# Allegro board bicycle.brd
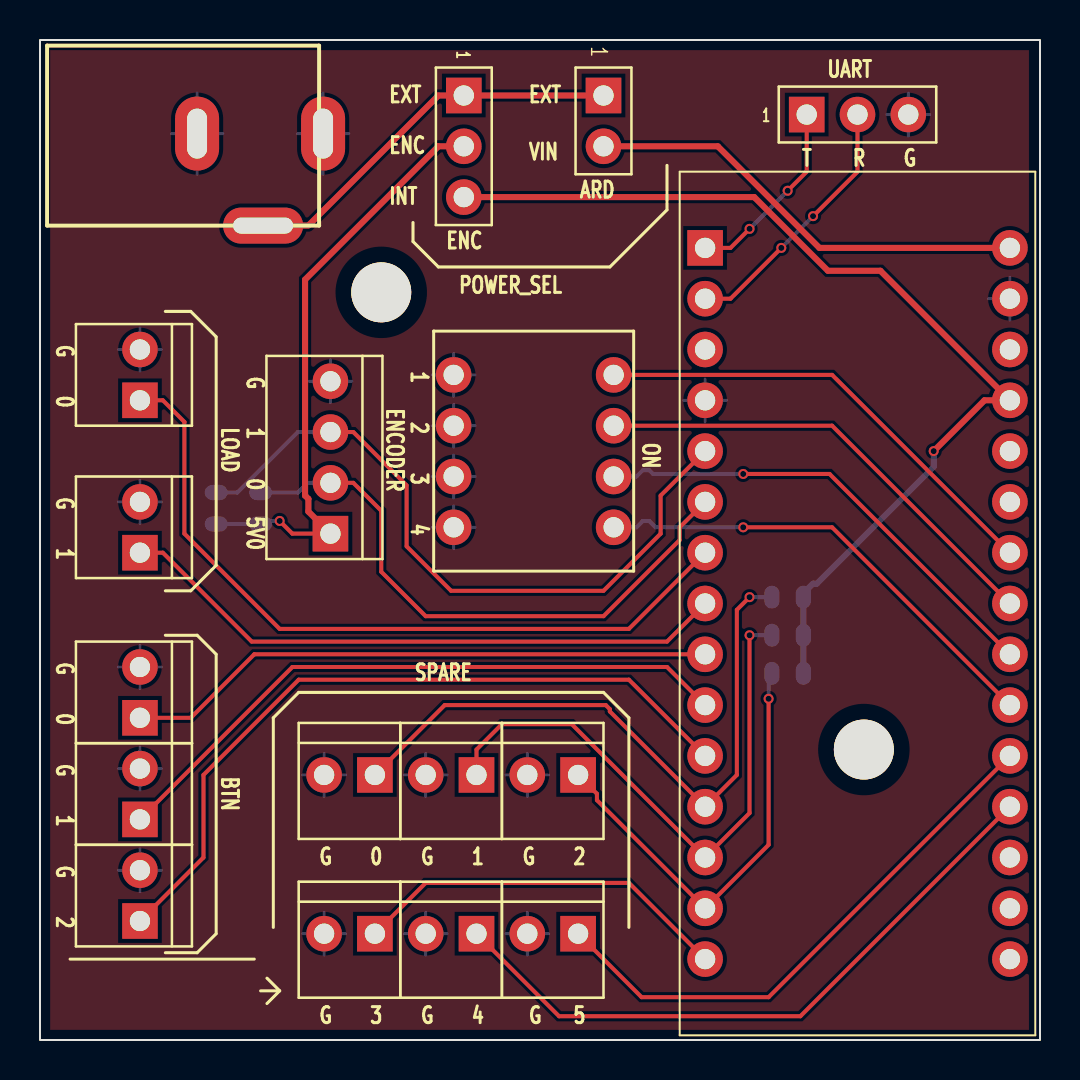
[diagram p0: board, top side]
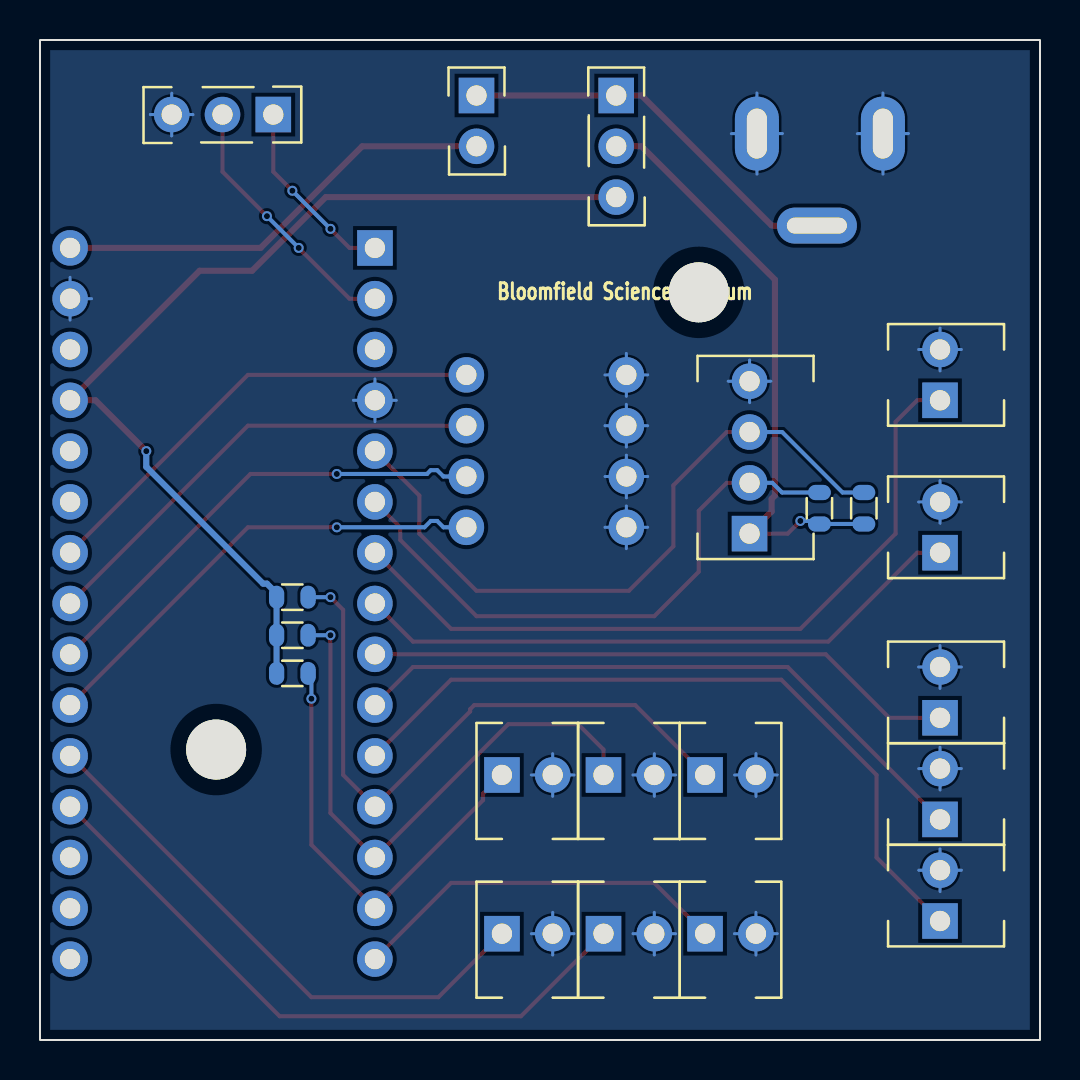
[diagram p1: board, bottom side, seen from below]

Outline 50 x 50 mm; copper layers: TOP, BOTTOM. Coordinates in mm from the lower left corner of the outline.
Outline path: rectangle 0,0 50,50

## Placement (name value [footprint] x y rotation side)
J5  Molex 2x1 TH  [MOLEX2X1_100_TH]  5 33.26 90 top
J6  Molex 2x1 TH  [MOLEX2X1_100_TH]  5 25.64 90 top
J7  Molex 2x1 TH  [MOLEX2X1_100_TH]  5 17.38 90 top
J8  Molex 2x1 TH  [MOLEX2X1_100_TH]  5 12.3 90 top
J9  Molex 2x1 TH  [MOLEX2X1_100_TH]  5 7.22 90 top
J10  Molex 2x1 TH  [MOLEX2X1_100_TH]  15.48 13.25 180 top
J11  Molex 2x1 TH  [MOLEX2X1_100_TH]  20.56 13.25 180 top
J12  Molex 2x1 TH  [MOLEX2X1_100_TH]  25.64 13.25 180 top
J13  Molex 2x1 TH  [MOLEX2X1_100_TH]  15.48 5.32 180 top
J14  Molex 2x1 TH  [MOLEX2X1_100_TH]  20.56 5.32 180 top
J15  Molex 2x1 TH  [MOLEX2X1_100_TH]  25.64 5.32 180 top
J17  Molex 4x1 TH  [MOLEX4X1_100_TH]  14.52 29.13 90 top
J18  HEADER 3x1 TH  [HEADER3X1_100_TH]  38.34 46.27 0 top
J19  HEADER 3x1 TH  [HEADER3X1_100_TH]  21.19 47.23 270 top
J20  HEADER 2x1 TH  [HEADER2X1_100_TH]  28.18 47.23 270 top
J21  DC-Jack-12V-1A  [POWER_CONNECTOR]  7.86 45.32 0 top
M1  -  [ARDUINO_NANO]  40.88 21.83 0 top
NOREF  -  [unnamed]  41.19 14.52 0 top
NOREF#2  -  [unnamed]  17.06 37.38 0 top
R1  7.32K  [0603]  11.03 26.59 90 bottom
R2  7.32K  [0603]  8.81 26.59 90 bottom
R3  7.32K  [0603]  37.38 22.14 0 bottom
R4  7.32K  [0603]  37.38 20.24 0 bottom
R5  7.32K  [0603]  37.38 18.33 0 bottom
SW1  SW DIP 4  [DIP_SW_4]  24.68 29.45 270 top

## Library data of the parts
J5-J15 J20 = HEADER 2X1 TH
J17 = HEADER 4X1 TH
J18 J19 = HEADER 3x1 TH
J21 = DC-JACK
M1 = arduino_nano
R1-R5 = RESISTOR
SW1 = SW DIP 4

## Footprints (pads in the part's own frame, mm; a bottom-side part is the same pattern mirrored in y, then rotated)
0603
  oval 0.762x1.143 smd: 1(-0.787,0) 2(0.787,0)
ARDUINO_NANO
  rect 1.778x1.778 hole 1.016: 1(-7.62,17.78)
  round 1.778 hole 1.016: 2(-7.62,15.24) 3(-7.62,12.7) 4(-7.62,10.16) 5(-7.62,7.62) 6(-7.62,5.08) 7(-7.62,2.54) 8(-7.62,0) 9(-7.62,-2.54) 10(-7.62,-5.08) 11(-7.62,-7.62) 12(-7.62,-10.16) 13(-7.62,-12.7) 14(-7.62,-15.24) 15(-7.62,-17.78) 16(7.62,-17.78) 17(7.62,-15.24) 18(7.62,-12.7) 19(7.62,-10.16) 20(7.62,-7.62) 21(7.62,-5.08) 22(7.62,-2.54) 23(7.62,0) 24(7.62,2.54) 25(7.62,5.08) 26(7.62,7.62) 27(7.62,10.16) 28(7.62,12.7) 29(7.62,15.24) 30(7.62,17.78)
DIP_SW_4
  round 1.778 hole 1.016: 1(-3.81,-4) 2(-1.27,-4) 3(1.27,-4) 4(3.81,-4) 5(3.81,4) 6(1.27,4) 7(-1.27,4) 8(-3.81,4)
HEADER2X1_100_TH
  rect 1.778x1.778 hole 1.016: 1(0,0)
  round 1.778 hole 1.016: 2(2.54,0)
HEADER3X1_100_TH
  rect 1.778x1.778 hole 1.016: 1(0,0)
  round 1.778 hole 1.016: 2(2.54,0) 3(5.08,0)
MOLEX2X1_100_TH
  rect 1.778x1.778 hole 1.016: 1(-1.27,0)
  round 1.778 hole 1.016: 2(1.27,0)
MOLEX4X1_100_TH
  rect 1.778x1.778 hole 1.016: 1(-3.81,0)
  round 1.778 hole 1.016: 2(-1.27,0) 3(1.27,0) 4(3.81,0)
POWER_CONNECTOR
  oval 4x1.8 hole 3x0.8: 1(3.3,-4.6)
  oval 2.2x3.7 hole 1x2.5: 2(0,0) 3(6.3,0)
unnamed
  round 2.997 hole 2.997 unplated: (0,0)

## Nets
3V3: M1.17(3V3)
5V0: J19.3 M1.27(5V) R3.2 R4.2 R5.2
GND: J5.2 J6.2 J7.2 J8.2 J9.2 J10.2 J11.2 J12.2 J13.2 J14.2 J15.2 J17.4 J18.3 J21.2(SHIELD) J21.3 M1.4(GND#4) M1.29(GND#29) SW1.1(A1) SW1.2(A2) SW1.3(A3) SW1.4(A4)
ARD_VIN: J20.2 M1.30(VIN)
BTN0: J7.1 M1.9(6)
BTN1: J8.1 M1.10(7)
BTN2: J9.1 M1.11(8)
ENC0: J17.2 M1.6(3) R1.2
ENC1: J17.3 M1.5(2) R2.2
ENC_5V0: J17.1 J19.2 R1.1 R2.1
EXT_5V0: J19.1 J20.1 J21.1(CENTER)
ID0: M1.24(19/ADC5) SW1.8(B1)
ID1: M1.23(18/ADC4) SW1.7(B2)
ID2: M1.22(17/ADC3) SW1.6(B3)
ID3: M1.21(16/ADC2) SW1.5(B4)
LOAD0: J5.1 M1.7(4)
LOAD1: J6.1 M1.8(5)
RX: J18.2 M1.2(0/RXD)
SPR0: J10.1 M1.12(9) R3.1
SPR1: J11.1 M1.13(10/SS) R4.1
SPR2: J12.1 M1.14(11/MOSI) R5.1
SPR3: J13.1 M1.15(12/MISO)
SPR4: J14.1 M1.19(14/ADC0)
SPR5: J15.1 M1.20(15/ADC1)
TX: J18.1 M1.1(1/TXD)

Pads without a net: M1 3 16 18 25 26 28

## Via types
v1: diameter 0.5, hole 0.305, TOP to BOTTOM, 11 vias

## Routing (per net, layer and track width the routed paths; a pad name or vN(x,y) marks a point on that pad's centre or on a via; arc(x,y) is an arc through that point)
5V0: length 50.3
  TOP w0.305: 21.19,42.15 35.71,42.15 39.39,38.46 42.02,38.46 M1.27 47.23,31.99 v1(44.69,29.45)
  BOTTOM w0.305: R5.2 R4.2 R3.2 38.17,22.33 38.65,22.82 38.85,22.82 44.69,28.66 v1(44.69,29.45)
GND: length 93.2
  BOTTOM w0.152: 19.62,33.26 SW1.1 ; SW1.1 21.75,33.26 ; SW1.1 20.68,34.32 ; SW1.1 20.68,32.19 ; 48.5,37.07 48.5,38.13 ; 48.5,37.07 47.43,37.07 ; 48.5,37.07 48.5,36 ; J18.3 43.42,47.34 ; J18.3 43.42,45.21 ; J18.3 42.35,46.27 ; J18.3 44.48,46.27 ; 19.29,12.19 J11.2 ; J11.2 19.29,14.32 ; J11.2 18.22,13.25 ; J11.2 20.35,13.25 ; J7.2 6.06,18.65 ; J7.2 3.93,18.65 ; J7.2 5,17.58 ; J7.2 5,19.72 ; 3.93,13.57 J8.2 ; J8.2 6.06,13.57 ; J8.2 5,14.64 ; J8.2 5,12.5 ; 13.14,5.32 J13.2 ; J13.2 14.21,4.25 ; J13.2 15.27,5.32 ; J13.2 14.21,6.38 ; 13.46,32.94 J17.4 ; J17.4 14.52,31.87 ; J17.4 14.52,34 ; J17.4 15.59,32.94 ; 33.26,31.99 33.26,33.05 ; 33.26,31.99 32.19,31.99 ; 33.26,31.99 33.26,30.92 ; 33.26,31.99 34.32,31.99 ; J15.2 24.37,6.38 ; J15.2 23.3,5.32 ; J15.2 25.43,5.32 ; J15.2 24.37,4.25 ; 18.22,5.32 J14.2 ; J14.2 19.29,4.25 ; J14.2 19.29,6.38 ; J14.2 20.35,5.32 ; 20.68,24.57 SW1.4 ; SW1.4 20.68,26.7 ; SW1.4 19.62,25.64 ; SW1.4 21.75,25.64 ; J6.2 6.06,26.91 ; J6.2 5,27.97 ; J6.2 3.93,26.91 ; J6.2 5,25.84 ; 6.58,45.32 J21.2 ; J21.2 7.86,43.29 ; J21.2 7.86,47.35 ; J21.2 9.13,45.32 ; 5,7.42 J9.2 ; J9.2 3.93,8.49 ; J9.2 6.06,8.49 ; J9.2 5,9.56 ; 13.14,13.25 J10.2 ; J10.2 14.21,12.19 ; J10.2 14.21,14.32 ; J10.2 15.27,13.25 ; SW1.3 20.68,29.24 ; SW1.3 19.62,28.18 ; SW1.3 21.75,28.18 ; SW1.3 20.68,27.11 ; J12.2 25.43,13.25 ; J12.2 24.37,14.32 ; J12.2 24.37,12.19 ; J12.2 23.3,13.25 ; 19.62,30.72 SW1.2 ; SW1.2 21.75,30.72 ; SW1.2 20.68,29.65 ; SW1.2 20.68,31.78 ; 14.15,43.29 J21.3 ; J21.3 15.43,45.32 ; J21.3 14.15,47.35 ; J21.3 12.88,45.32 ; 5,33.46 J5.2 ; J5.2 6.06,34.53 ; J5.2 3.93,34.53 ; J5.2 5,35.59
ARD_VIN: length 22.4
  TOP w0.305: M1.30 38.97,39.61 33.89,44.69 28.18,44.69
BTN0: length 29.6
  TOP w0.203: J7.1 7.54,16.11 10.71,19.29 33.26,19.29
BTN1: length 32.2
  TOP w0.203: 33.26,16.75 31.35,18.65 12.62,18.65 J8.1
BTN2: length 37.3
  TOP w0.203: J9.1 8.17,9.13 8.17,13.25 12.94,18.02 29.45,18.02 33.26,14.21
ENC0: length 29.7
  TOP w0.203: 33.26,26.91 31.99,25.64 31.99,25 28.18,21.19 19.29,21.19 17.06,23.41 17.06,26.46 15.67,27.86 J17.2
  BOTTOM w0.203: J17.2 13.38,27.86 12.9,27.37 R1.2
ENC1: length 34.8
  TOP w0.203: 33.26,29.45 31.03,27.22 31.03,25.32 28.18,22.46 20.56,22.46 18.33,24.68 18.33,27.73 15.67,30.4 J17.3
  BOTTOM w0.203: R2.2 9.87,27.37 12.89,30.4 J17.3
ENC_5V0: length 30
  TOP w0.203: J17.1 12.62,25.32 v1(11.98,25.95)
  TOP w0.305: J17.1 13.42,26.42 13.42,27.06 13.25,27.22 13.25,38.02 19.92,44.69 21.19,44.69
  BOTTOM w0.203: R2.1 R1.1 11.18,25.95 v1(11.98,25.95)
EXT_5V0: length 19.7
  TOP w0.203: 13.46,40.76 13.42,40.72
  TOP w0.305: 13.46,40.76 19.92,47.23 J19.1 J20.1 ; 13.42,40.72 J21.1
ID0: length 23.5
  TOP w0.203: SW1.8 39.61,33.26 48.5,24.37
ID1: length 23.5
  TOP w0.203: SW1.7 39.61,30.72 M1.23
ID2: length 23.8
  TOP w0.203: M1.22 39.48,28.3 v1(35.16,28.3)
  BOTTOM w0.203: SW1.6 29.83,28.18 30.14,28.49 30.46,28.49 30.65,28.3 v1(35.16,28.3)
ID3: length 23.8
  TOP w0.203: 48.5,16.75 39.61,25.64 v1(35.16,25.64)
  BOTTOM w0.203: v1(35.16,25.64) 30.78,25.64 30.46,25.95 30.14,25.95 29.83,25.64 SW1.5
LOAD0: length 37.8
  TOP w0.203: 5,31.99 6.14,31.99 7.22,30.91 7.22,25.32 11.98,20.56 29.45,20.56 33.26,24.37
LOAD1: length 30.9
  TOP w0.203: 33.26,21.83 31.35,19.92 10.59,19.92 6.14,24.37 J6.1
RX: length 13.1
  TOP w0.203: v1(37.07,39.61) 34.53,37.07 33.26,37.07 ; v1(38.65,41.19) 40.88,43.42 J18.2
  BOTTOM w0.203: v1(37.07,39.61) v1(38.65,41.19)
SPR0: length 32.6
  TOP w0.203: v1(35.48,22.14) 34.84,21.51 34.84,13.25 33.26,11.67 28.49,16.43 28.49,16.54 28.29,16.75 20.24,16.75 J10.1
  BOTTOM w0.203: v1(35.48,22.14) R3.1
SPR1: length 29.1
  TOP w0.203: J11.1 21.83,14.52 23.1,15.79 26.59,15.79 33.26,9.13 35.48,11.35 v1(35.48,20.24)
  BOTTOM w0.203: v1(35.48,20.24) R4.1
SPR2: length 22.4
  TOP w0.203: J12.1 27.85,12.31 27.85,11.99 33.26,6.59 36.43,9.76 v1(36.43,17.06)
  BOTTOM w0.203: v1(36.43,17.06) 36.43,18.17 R5.1
SPR3: length 19.1
  TOP w0.203: J13.1 19.29,7.86 29.45,7.86 33.26,4.05
SPR4: length 32.7
  TOP w0.203: J14.1 25.95,1.19 38.02,1.19 M1.19
SPR5: length 27.9
  TOP w0.203: J15.1 30.08,2.14 36.43,2.14 M1.20
TX: length 9.5
  TOP w0.203: 33.26,39.61 34.53,39.61 v1(35.48,40.56) ; J18.1 38.34,43.42 v1(37.38,42.46)
  BOTTOM w0.203: v1(35.48,40.56) v1(37.38,42.46)

## Copper pours and planes (outline as drawn; the poured copper is in the pictures)
GND on BOTTOM: 0.51,0.51 0.51,49.49 49.49,49.49 49.49,0.51
Net_26 on TOP: 0.51,0.51 0.51,49.49 49.45,49.49 49.45,0.51

## Text on the board
Ref Des/Silkscreen Bottom: Bloomfield Science Museum
Ref Des/Silkscreen Top: G | 0 | 3 | EXT | ENC | INT | SPARE | POWER_SEL | 1 | 4 | VIN | 2 | 5 | ARD | T | UART | R | LOAD | BTN | 5V0 | ENCODER
